# EAGLE board Proton PCB Eagle (EAGLE 9.6.2)
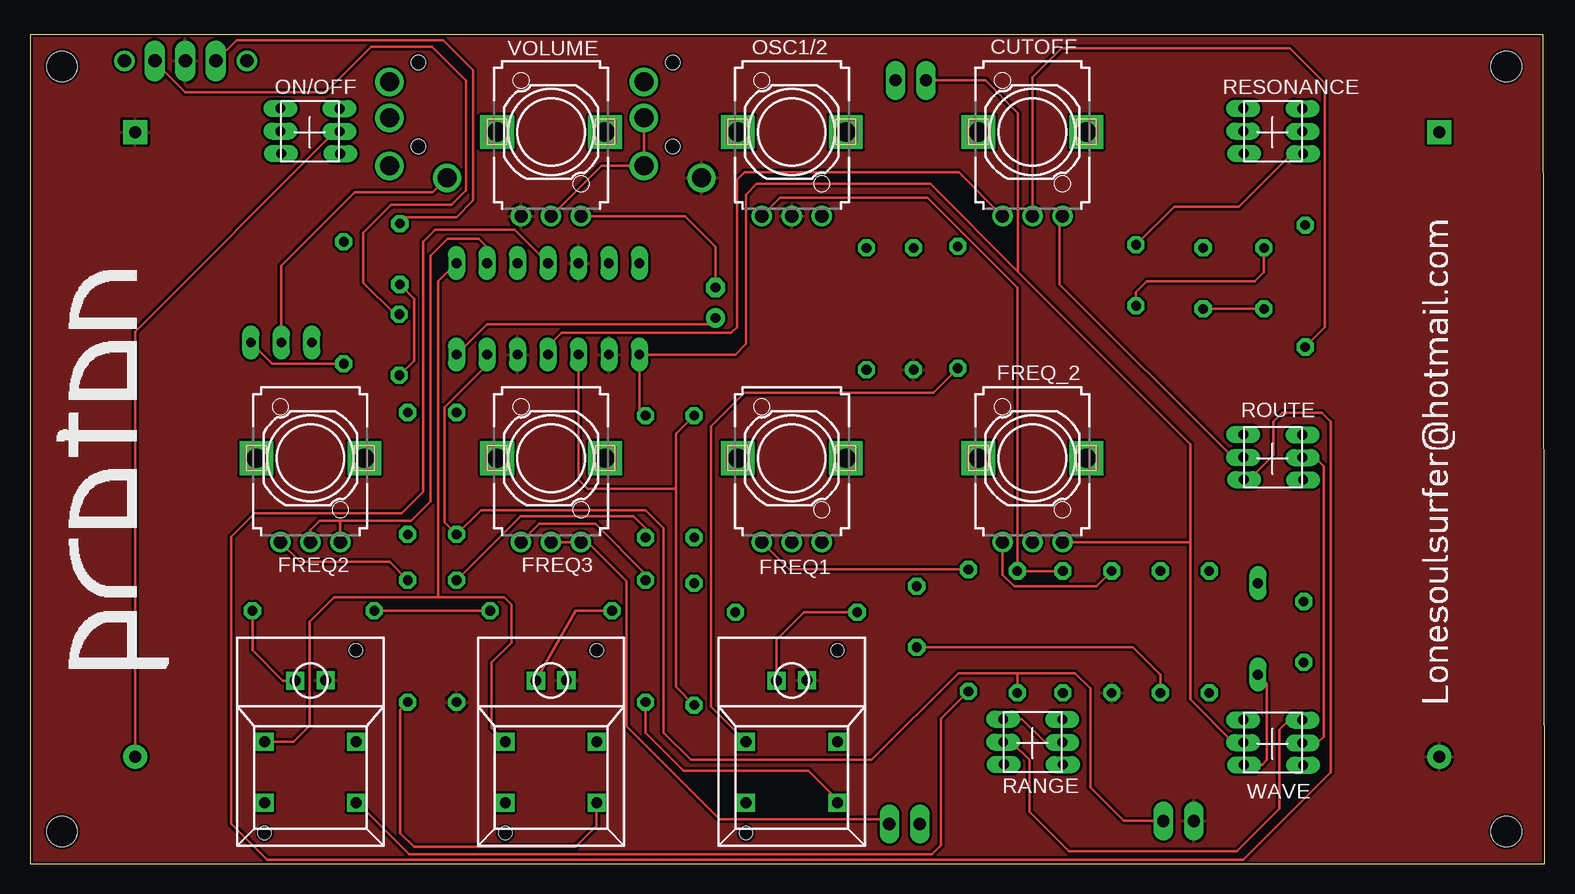
[diagram p0: board, top side]
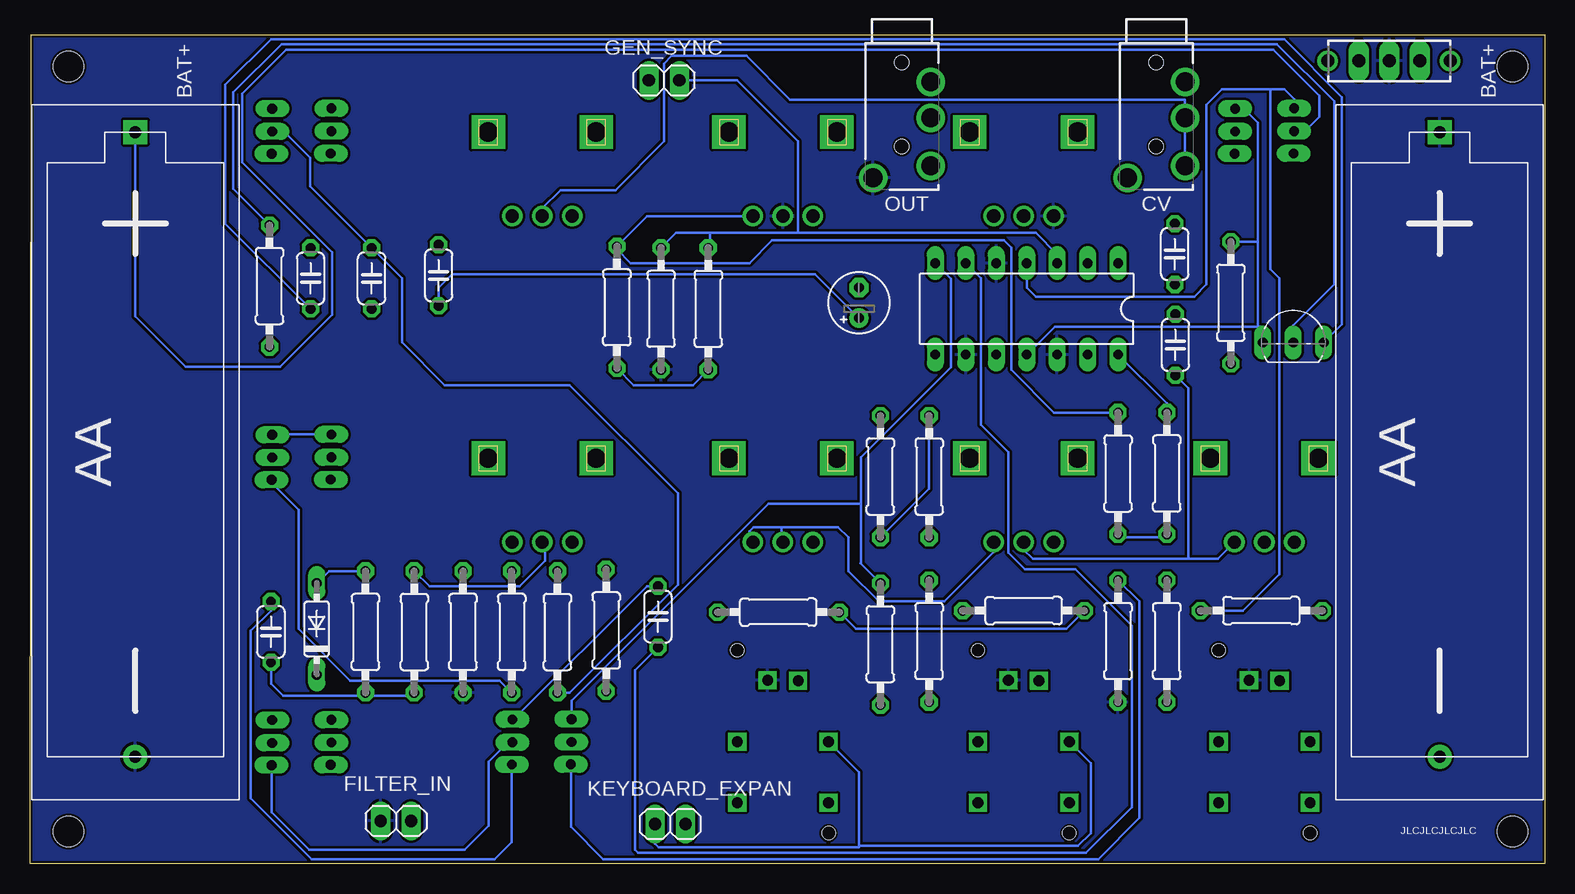
[diagram p1: board, bottom side, seen from below]

Size 126.26 x 69.08 mm. Coordinates in mm from the lower left corner, seen from the top.
Outline: 0,0 126.26,0 126.16,69.08 0,69.08 0,0
Copper layers (1*16): Top 0.035mm / dielectric 1.5mm / Bottom 0.035mm
Design rules "SparkFun": minimum track width 8mil, minimum drill 20mil, track to track 8mil, track to pad 8mil, pad to pad 8mil, via to via 8mil, smd to smd 8mil, copper to edge 8mil, drill to drill 8mil, minimum pad ring 12mil, minimum via ring 10mil, stop-mask expansion 4mil, vias tented up to drill 20mil, thermal gap 10mil
Holes 2.54 mm at 2.67,66.42 2.67,2.67 123.06,2.67 123.06,66.42

## Footprints (pad centres in the part's own frame; a part is rotated, then mirrored left to right if it is on the bottom)
0207/10 = drill 0.813 octagon: 1 -5.08,0; 2 5.08,0
C050-024X044 = drill 0.813 octagon: 1 -2.54,0; 2 2.54,0
E2,5-5 = drill 0.813 pad 1.6: + -1.27,0 | drill 0.813 pad 1.6 octagon: - 1.27,0
EVUFXM = drill 1.1 pad 1.676: 1 -2.5,-7; 2 0,-7; 3 2.5,-7 | drill 1.6 pad 2.8 square: M1 4.5,0; M2 -4.5,0
PJ320A = drill 1.58 pad 2.37: 2 0,0; 3 3,0; 4 7,0; 5 8,-4.8 | hole 1.2: -1.6,-2.4; 5.4,-2.4
DO35-7 = drill 0.813 long: A 3.81,0; C -3.81,0
1X02 = drill 1.016 long: 1 -1.27,0; 2 1.27,0
DIL14 = drill 0.813 long: 1 -7.62,-3.81; 2 -5.08,-3.81; 3 -2.54,-3.81; 4 0,-3.81; 5 2.54,-3.81; 6 5.08,-3.81; 7 7.62,-3.81; 8 7.62,3.81; 9 5.08,3.81; 10 2.54,3.81; 11 0,3.81; 12 -2.54,3.81; 13 -5.08,3.81; 14 -7.62,3.81
SWITCH-6PIN = drill 0.813 long: 1 -2.997,2.489; 2 -2.997,0.584; 3 -2.946,-1.27; 4 1.93,2.464; 5 1.93,0.559; 6 1.981,-1.295
TO92-EBC = drill 0.813 long: B 0,-1.27; C -2.54,-1.27; E 2.54,-1.27
5501-1LED = drill 0.9 pad 1.5 square: 1A 0,3.81; 1B 0,-3.81; + -5.08,-1.27; - -5.131,1.27; NC 5.08,-3.81; NO 5.08,3.81 | hole 1.1: -7.62,3.81; 7.62,-3.81
TL3XYO = drill 1.1 pad 1.422 long: 1 -2.54,0.762; 2 0,0.762; 3 2.54,0.762 | drill 1.1 pad 1.676: M1 -5.08,0.762; M2 5.131,0.762
BATTERY-HOLDER-2AA = drill 1 pad 2 square: BAT+ -26.416,1.524 | drill 1 pad 2: BAT- 25.654,1.524

## Placement (x,y rotation side)
1K  1k  [0207/10]  90.17,19.3 90 bottom
1K1  1k  [0207/10]  98.3,19.3 90 bottom
100K  100K  [0207/10]  94.23,19.3 270 bottom
100K1  100K  [0207/10]  55.37,18.29 270 bottom
100K2  270K  [0207/10]  55.37,32.26 270 bottom
100K3  100K  [0207/10]  51.31,32.26 270 bottom
100K4  100K  [0207/10]  35.56,18.54 90 bottom
100K5  100K  [0207/10]  86.11,19.3 90 bottom
100K6  10k  [0207/10]  82.3,19.3 270 bottom
100K7  100K  [0207/10]  77.34,46.36 90 bottom
100K8  100K  [0207/10]  35.56,32.51 270 bottom
100K9  100K  [0207/10]  26.16,46.74 270 bottom
100K10  10k  [0207/10]  106.3,48.13 270 bottom
100K11  100K  [0207/10]  31.5,32.51 90 bottom
100K12  100K  [0207/10]  69.72,46.23 270 bottom
100K13  100K  [0207/10]  73.66,46.23 90 bottom
100K14  10K  [0207/10]  78.23,19.43 90 bottom
100K15  10K  [0207/10]  31.5,18.54 90 bottom
100K16  10K  [0207/10]  51.31,18.54 90 bottom
100K18  100R  [0207/10]  23.62,21.08 180 bottom
100K19  100R  [0207/10]  43.43,21.08 0 bottom
100K20  100R  [0207/10]  63.88,20.95 0 bottom
C1  100nf  [C050-024X044]  73.91,20.57 90 bottom
C2  10nf  [C050-024X044]  106.17,19.3 90 bottom
C3  22nf  [C050-024X044]  97.79,48.77 270 bottom
C4  22nf  [C050-024X044]  102.87,48.77 90 bottom
C5  1nf  [C050-024X044]  92.2,49.02 270 bottom
C6  220nf  [C050-024X044]  30.84,50.8 270 bottom
C7  100nf  [C050-024X044]  30.78,43.23 270 bottom
C8  1uf  [E2,5-5]  57.15,46.74 90 bottom
CUTOFF  100K  [EVUFXM]  83.57,60.96 0 top
CV  PJ-320A  [PJ320A]  29.97,65.15 270 bottom
D1  1N4148DO35-7  [DO35-7]  102.36,19.56 90 bottom
FILTER_IN  [1X02]  95.76,3.56 0 bottom
FREQ1  100K  [EVUFXM]  63.5,33.78 0 top
FREQ2  100K  [EVUFXM]  23.37,33.78 0 top
FREQ3  100K  [EVUFXM]  43.43,33.78 0 top
FREQ_2  100K  [EVUFXM]  83.57,33.78 0 top
GEN_SYNC  [1X02]  73.41,65.28 180 bottom
IC1  MCP604P  [DIL14]  43.18,46.23 180 bottom
KEYBOARD_EXPAN  [1X02]  72.9,3.3 0 bottom
ON/OFF  SWITCH-6PIN  [SWITCH-6PIN]  23.88,60.45 0 top
OSC1/2  100K  [EVUFXM]  63.5,60.96 0 top
OUT  PJ-320A  [PJ320A]  51.18,65.15 270 bottom
Q1  BC546A  [TO92-EBC]  20.95,44.7 0 bottom
RANGE  SWITCH-6PIN  [SWITCH-6PIN]  84.12,9.55 0 top
RESONANCE  SWITCH-6PIN  [SWITCH-6PIN]  104.14,60.45 0 top
ROUTE  SWITCH-6PIN  [SWITCH-6PIN]  104.14,33.27 0 top
S1  5501-1LED  [5501-1LED]  43.43,10.16 270 top
S2  5501-1LED  [5501-1LED]  63.5,10.16 270 top
S3  TL32YO  [TL3XYO]  12.95,67.67 180 bottom
S4  5501-1LED  [5501-1LED]  23.37,10.16 270 top
U$1  BATTERY-HOLDER-2AA  [BATTERY-HOLDER-2AA]  119,34.54 270 bottom
U$2  BATTERY-HOLDER-2AA  [BATTERY-HOLDER-2AA]  10.29,34.54 270 bottom
VOLUME  100K  [EVUFXM]  43.43,60.96 0 top
WAVE  SWITCH-6PIN  [SWITCH-6PIN]  104.14,9.5 0 top

## Library data of the parts
1K 1K1 100K 100K1-100K16 100K18-100K20 = rcl; SPICEPREFIX: R
C1-C8 = rcl; SPICEPREFIX: C
CUTOFF FREQ1-FREQ3 FREQ_2 OSC1/2 VOLUME = pot
CV OUT = PJ-320A; DESCRIPTION: 3.5 mm Audio Jack Connector PCB Mount Female Socket 4 Pin PJ-320A; HEIGHT: 5.3mm; MANUFACTURER_NAME: XKB Connectivity; MANUFACTURER_PART_NUMBER: PJ-320A
D1 = diode
FILTER_IN GEN_SYNC KEYBOARD_EXPAN = pinhead
IC1 = linear
ON/OFF RANGE RESONANCE ROUTE U$1 U$2 WAVE = My Library
Q1 = transistor-npn
S1-S4 = switch

## Nets
GND: 1K.1 100K4.1 100K13.1 FILTER_IN.1 IC1.5 IC1.9 IC1.12 OSC1/2.2 OUT.5 S1.- S2.- S3.2 S4.- U$1.BAT- U$2.BAT+ VOLUME.1
N$1: 100K1.2 100K2.1 IC1.10
N$2: 100K.1 FREQ_2.2
N$3: 1K.2 FREQ_2.1
N$4: C1.2 RANGE.4
N$5: C2.2 RANGE.6
N$6: 1K1.1 100K.2 C1.1 C2.1 IC1.6
N$7: ROUTE.5 WAVE.5
N$8: 1K1.2 D1.A
N$9: 100K2.2 100K3.1 FREQ_2.3 GEN_SYNC.2 IC1.8 WAVE.2
N$10: D1.C WAVE.3
N$11: ROUTE.1 ROUTE.4
N$12: 100K5.1 ROUTE.6
N$13: 100K5.2 100K6.1 OSC1/2.1
N$14: 100K18.1 S4.+
N$15: C8.- VOLUME.3
N$16: 100K9.2 C3.2 C4.1 Q1.E
N$18: CUTOFF.3 ROUTE.2
N$19: C5.1 RESONANCE.6
N$20: 100K11.2 C4.2 C5.2 C8.+ IC1.14
N$21: 100K7.2 100K8.1 OSC1/2.3
N$22: 100K6.2 100K8.2 100K11.1 C3.1 FILTER_IN.2 IC1.13 RESONANCE.5
N$23: 100K19.1 S1.+
N$24: 100K10.1 CV.5 Q1.B
N$25: 100K20.1 S2.+
N$26: 100K12.1 100K13.2 GEN_SYNC.1 IC1.3
N$27: ON/OFF.2 U$1.BAT+
N$28: C6.2 C7.2 FREQ1.2 FREQ1.3 FREQ2.2 FREQ2.3 FREQ3.2 FREQ3.3 IC1.2 KEYBOARD_EXPAN.2
N$29: 100K14.1 S4.NO
N$30: 100K15.1 S1.NO
N$31: 100K16.1 S2.NO
N$32: 100K7.1 100K12.2 IC1.1 KEYBOARD_EXPAN.1 S1.1B S2.1B S4.1B
N$33: 100K14.2 FREQ1.1
N$34: 100K15.2 FREQ2.1
N$35: 100K16.2 FREQ3.1
N$36: ON/OFF.5 U$2.BAT-
N$37: C6.1 S3.3
N$38: C7.1 S3.1
N$39: OUT.3 OUT.4 VOLUME.2
N$40: 100K10.2 CUTOFF.2 CV.3 CV.4
SEC_WAVE: RANGE.2 WAVE.4
SQR: 100K3.2 100K4.2 RANGE.3
TRI_SAW: 100K1.1 IC1.7 RANGE.1 RANGE.5 WAVE.6
VCC: 100K18.2 100K19.2 100K20.2 IC1.4 ON/OFF.1 ROUTE.3
VSS: 100K9.1 CUTOFF.1 IC1.11 ON/OFF.4 Q1.C

## Tracks (layer width: path | path; a pad name or v marks a point on that pad's centre or on a via)
GND
  pour Top: 0,69.09 126.24,69.09 126.24,0 0,0
  pour Bottom: 0,69.09 126.24,69.09 126.24,0 0,0
N$1
  Top 0.203: IC1.10 45.72,32 46.48,31.24 53.85,31.24 | 53.85,31.24 53.85,14.73 100K1.2 | 100K2.1 53.85,35.81 53.85,31.24
N$2
  Bottom 0.203: 100K.1 92.96,23.11 85.46,23.11 83.31,25.26 83.31,26.27 83.57,26.53 FREQ_2.2
N$3
  Top 0.203: FREQ_2.1 81.07,24.09 82.04,23.11 88.9,23.11 1K.2
N$4
  Bottom 0.203: RANGE.4 85.94,12.01 74.84,23.11 C1.2
N$5
  Bottom 0.203: C2.2 106.17,21.08 107.85,19.41 107.85,5.45 102.76,0.36 87.52,0.36 86.11,1.78 RANGE.6
N$6
  Top 0.203: C1.1 91.95,18.03 94.23,15.75 100K.2
  Bottom 0.203: IC1.6 46.99,48.77 46.99,36.58 44.7,34.29 44.7,25.91 43.31,24.51 39.12,24.51 34.42,19.81 34.42,4.7 38.23,0.89 75.56,0.89 75.82,1.14 75.82,16.13 C1.1 | 98.3,13.97 1K1.1 | 98.3,13.97 94.49,13.97 100K.2 | 98.3,13.97 105.16,13.97 106.17,14.99 C2.1
N$7
  Top 0.203: WAVE.5 107.33,10.06 107.85,10.58 107.85,33.12 107.14,33.83 ROUTE.5
N$8
  Bottom 0.203: 1K1.2 101.35,24.38 D1.A
N$9
  Top 0.203: WAVE.2 100.33,10.08 96.73,13.68 96.73,26.78 | 82.36,49.34 75.06,56.64 60.58,56.64 59.69,55.75 59.69,43.31 58.8,42.42 IC1.8 50.8,37.85 100K3.1 | 82.36,49.34 96.73,34.97 96.73,26.78 | FREQ_2.3 96.73,26.78 | GEN_SYNC.2 79.63,65.28 82.36,62.55 82.36,49.34
  Bottom 0.203: 100K3.1 51.31,31.24 100K2.2
N$10
  Top 0.203: WAVE.3 102.72,8.23 103.12,8.64 103.12,14.99 D1.C
N$11
  Bottom 0.203: ROUTE.1 106.05,35.76 ROUTE.4
N$12
  Bottom 0.203: ROUTE.6 106.12,31.73 103.89,29.49 103.89,19.56 99.57,15.24 87.12,15.24 100K5.1
N$13
  Top 0.203: 100K5.2 100K6.1 82.3,48.01 74.82,55.48 62.52,55.48 OSC1/2.1
N$14
  Top 0.203: 100K18.1 18.54,17.78 21.08,15.24 S4.+
N$15
  Top 0.203: VOLUME.3 54.61,53.96 57.15,51.42 C8.-
N$16
  Top 0.203: C3.2 C4.1 | Q1.E 20.19,41.66 100K9.2
  Bottom 0.203: Q1.E 16.89,44.96 16.89,63.88 21.71,68.71 106.17,68.71 109.98,64.9 109.98,53.34 C4.1
N$18
  Top 0.203: CUTOFF.3 85.81,53.71 85.81,48.3 100.25,33.86 ROUTE.2
N$19
  Top 0.203: C5.1 95.38,54.74 100.79,54.74 105.21,59.16 RESONANCE.6
N$20
  Top 0.203: IC1.14 38.1,44.96 56.64,44.96 C8.+ | C5.2 92.2,47.62 93.09,48.51 102.11,48.51 102.87,49.28 C4.2
  Bottom 0.203: IC1.14 31.5,38.35 100K11.2 | C8.+ 60.81,49.12 91.08,49.12 92.2,48.01 C5.2
N$21
  Bottom 0.203: 100K8.1 40.89,37.59 44.45,41.15 44.45,51.31 45.09,51.94 64.39,51.94 66.29,50.04 76.2,50.04 77.34,51.18 100K7.2 74.82,53.96 OSC1/2.3
N$22
  Top 0.203: IC1.13 38.1,41.57 34.54,38.01 34.54,28.45 100K8.2 37.59,29.46 51.31,29.46 52.83,27.94 52.83,10.92 55.12,8.64 70.16,8.64 77.4,15.87 82.3,15.87 | 100K6.2 82.3,15.87 | 82.3,15.87 87.12,15.87 88.39,14.61 88.39,6.35 91.19,3.56 FILTER_IN.2
  Bottom 0.203: 100K11.1 31.75,27.18 35.31,27.18 100K8.2 | 100K6.2 81.28,14.22 72.26,23.24 72.26,30.86 81.28,39.88 91.69,39.88 95.25,43.43 95.25,48.77 C3.1 102.92,56.44 102.92,58.83 105.11,61.01 RESONANCE.5
N$23
  Top 0.203: S1.+ 45.47,21.08 100K19.1
N$24
  Top 0.203: Q1.B 20.95,49.84 27.08,55.96 33.58,55.96 CV.5
  Bottom 0.203: 100K10.1 109.31,56.23 109.31,64.26 105.28,68.29 22.32,68.29 17.55,63.52 17.55,48.26 20.95,44.86 Q1.B
N$25
  Top 0.203: S2.+ 62.23,18.64 64.54,20.95 100K20.1
N$26
  Bottom 0.203: 100K13.2 72.39,52.58 69.6,52.58 | 100K12.1 69.6,51.31 69.6,52.58 | IC1.3 40.64,50.8 42.42,52.58 62.23,52.58 | 62.23,52.58 69.6,52.58 | GEN_SYNC.1 67.31,65.28 62.23,60.2 62.23,52.58
N$27
  Bottom 0.203: ON/OFF.2 19.99,61.04 18.8,62.23 18.8,64.01 22.61,67.82 104.9,67.82 108.58,64.13 108.58,58.46 101.09,50.97 101.09,45.72 105.41,41.4 113.28,41.4 117.47,45.59 U$1.BAT+
N$28
  Top 0.203: FREQ2.2 23.37,27.8 24.13,28.56 25.91,28.56 | 25.91,28.56 31.75,28.56 33.4,30.21 33.4,50.67 34.8,52.07 37.39,52.07 38.1,51.36 IC1.2 | FREQ3.3 FREQ3.2 46.48,26.78 49.73,23.53 49.73,11.44 57.49,3.68 71.25,3.68 KEYBOARD_EXPAN.2 | FREQ2.3 25.87,28.52 25.91,28.56 | C6.2 32,47.09 32,41.91 C7.2
  Bottom 0.203: FREQ3.3 45.93,25.95 50.04,21.84 55.5,21.84 58.04,24.38 58.04,27.18 58.9,28.04 63.63,28.04 | 63.63,28.04 63.63,26.91 FREQ1.2 | 63.63,28.04 65.94,28.04 66.29,27.69 66.29,27.08 FREQ1.3 | 29.72,25.4 42.67,25.4 43.43,26.16 FREQ3.2 | 29.72,25.4 29.72,39.62 C7.2 | 29.72,25.4 27.25,25.4 FREQ2.3
N$29
  Top 0.203: 100K14.1 75.95,12.06 75.95,1.52 75.18,0.76 31.62,0.76 27.3,5.08 S4.NO
N$30
  Top 0.203: S1.NO 47.24,3.17 45.47,1.4 32,1.4 30.86,2.54 30.86,12.83 100K15.1
N$31
  Top 0.203: 100K16.1 51.31,10.92 54.48,7.75 64.9,7.75 67.31,5.33 S2.NO
N$32
  Top 0.203: IC1.1 34.04,48.51 34.04,22.19 | S2.1B 56.77,13.08 56.77,36.45 59.56,39.24 75.31,39.24 100K7.1 | S4.1B 21.97,10.16 23.32,11.51 23.32,20.14 25.37,22.19 34.04,22.19 | 34.04,22.19 39.53,22.19 40.13,21.59 40.13,18.41 38.48,16.76 38.48,11.3 S1.1B
  Bottom 0.203: 100K7.1 75.95,39.88 70.99,39.88 100K12.2 | S1.1B 37.85,8.38 37.85,2.54 38.91,1.48 57.15,1.48 | S2.1B 57.15,7.62 57.15,1.48 | 57.15,1.48 57.15,1.35 73.87,1.35 74.17,1.65 KEYBOARD_EXPAN.1
N$33
  Top 0.203: FREQ1.1 63.27,24.51 100K14.2
N$34
  Top 0.203: FREQ2.1 22.5,25.15 29.97,25.15 100K15.2
N$35
  Top 0.203: 100K16.2 51.31,24.13 47.13,28.31 42.46,28.31 FREQ3.1
N$36
  Top 0.203: U$2.BAT- 8.76,44.32 25.45,61.01 ON/OFF.5
N$37
  Top 0.203: S3.3 17.22,68.63 34.44,68.63 36.96,66.12 36.96,55.27 35.56,53.87 31.37,53.87 C6.1
N$38
  Top 0.203: C7.1 30.43,45.77 27.79,48.41 27.79,52.58 30.12,54.91 35.13,54.91 36.35,56.13 36.35,65.25 33.53,68.07 28.45,68.07 24.64,64.26 12.95,64.26 10.41,66.8 S3.1
N$39
  Top 0.203: OUT.3 51.18,58.17 | 51.18,58.17 OUT.4 | VOLUME.2 47.64,58.17 51.18,58.17
N$40
  Top 0.203: CUTOFF.2 83.57,65.52 85.99,67.94 105.03,67.94 107.95,65.02 107.95,44.7 100K10.2
  Bottom 0.203: CUTOFF.2 83.57,54.61 82.04,56.13 77.47,56.13 73.41,60.2 73.41,66.67 72.77,67.31 66.55,67.31 62.9,63.66 29.97,63.66 CV.3 CV.4
SEC_WAVE
  Top 0.203: WAVE.4 104.93,11.96 104.14,11.18 104.14,4.57 100.58,1.02 86.61,1.02 83.31,4.32 83.31,8.64 81.81,10.13 RANGE.2
SQR
  Top 0.203: 100K4.2 40.89,28.96 50.29,28.96 51.31,27.94 100K3.2
  Bottom 0.203: 100K4.2 33.78,21.84 33.78,3.81 37.21,0.38 78.49,0.38 81.18,3.07 RANGE.3
TRI_SAW
  Top 0.203: RANGE.1 82.7,12.04 84.63,10.11 RANGE.5
  Bottom 0.203: WAVE.6 106.12,4.29 103,1.17 90.02,1.17 88.04,3.15 88.04,8.47 86.87,9.64 86.87,9.91 86.67,10.11 RANGE.5 | 100K1.1 57.02,25.02 57,25.04 57,29.97 | IC1.7 49.51,48.74 49.51,41.38 57,33.88 57,29.97 | RANGE.1 81.13,13.56 64.72,29.97 57,29.97
VCC
  Top 0.203: IC1.4 40.39,52.83 33.78,52.83 32.77,51.82 32.77,30.99 30.99,29.21 18.73,29.21 16.76,27.24 16.76,3.3 19.76,0.3 101.14,0.3 108.46,7.62 108.46,36.83 107.7,37.59 104.39,37.59 103.63,36.83 103.63,34.04 101.6,32 ROUTE.3 | 100K18.2 100K19.2
  Bottom 0.203: 100K19.2 39.88,19.56 57.4,19.56 100K20.2 | 100K18.2 25.15,21.08 22.1,24.12 22.1,48.77 22.86,49.53 22.86,64.52 | 22.86,64.52 26.92,64.52 28.19,63.25 28.19,48.26 29.21,47.24 42.42,47.24 43.18,48.01 IC1.4 | ON/OFF.1 20.88,63.7 21.69,64.52 22.86,64.52
VSS
  Top 0.203: CUTOFF.1 77.42,57.6 59.56,57.6 58.93,56.97 58.93,44.7 58.46,44.23 44.32,44.23 43.18,43.09 IC1.11
  Bottom 0.203: IC1.11 40.84,44.76 23.9,44.76 | 23.9,44.76 23.62,44.76 23.5,44.63 Q1.C | 100K9.1 23.9,51.82 | 23.9,51.82 23.9,44.76 | 23.9,51.82 23.9,61.75 25.07,62.92 ON/OFF.4

## Text on the board
bPlace: JLCJLCJLCJLC